# Altium PCB PCB1.PcbDoc
Units mm, origin at the board's own origin, x right, y up, seen from the top; angles counter-clockwise.
Board outline 280 x 120 mm, 2 copper layers (Top Layer, Bottom Layer); 355 components, 276 nets, 1028 pads, 0 vias.
Unrouted connection lines stored in the file: 715.
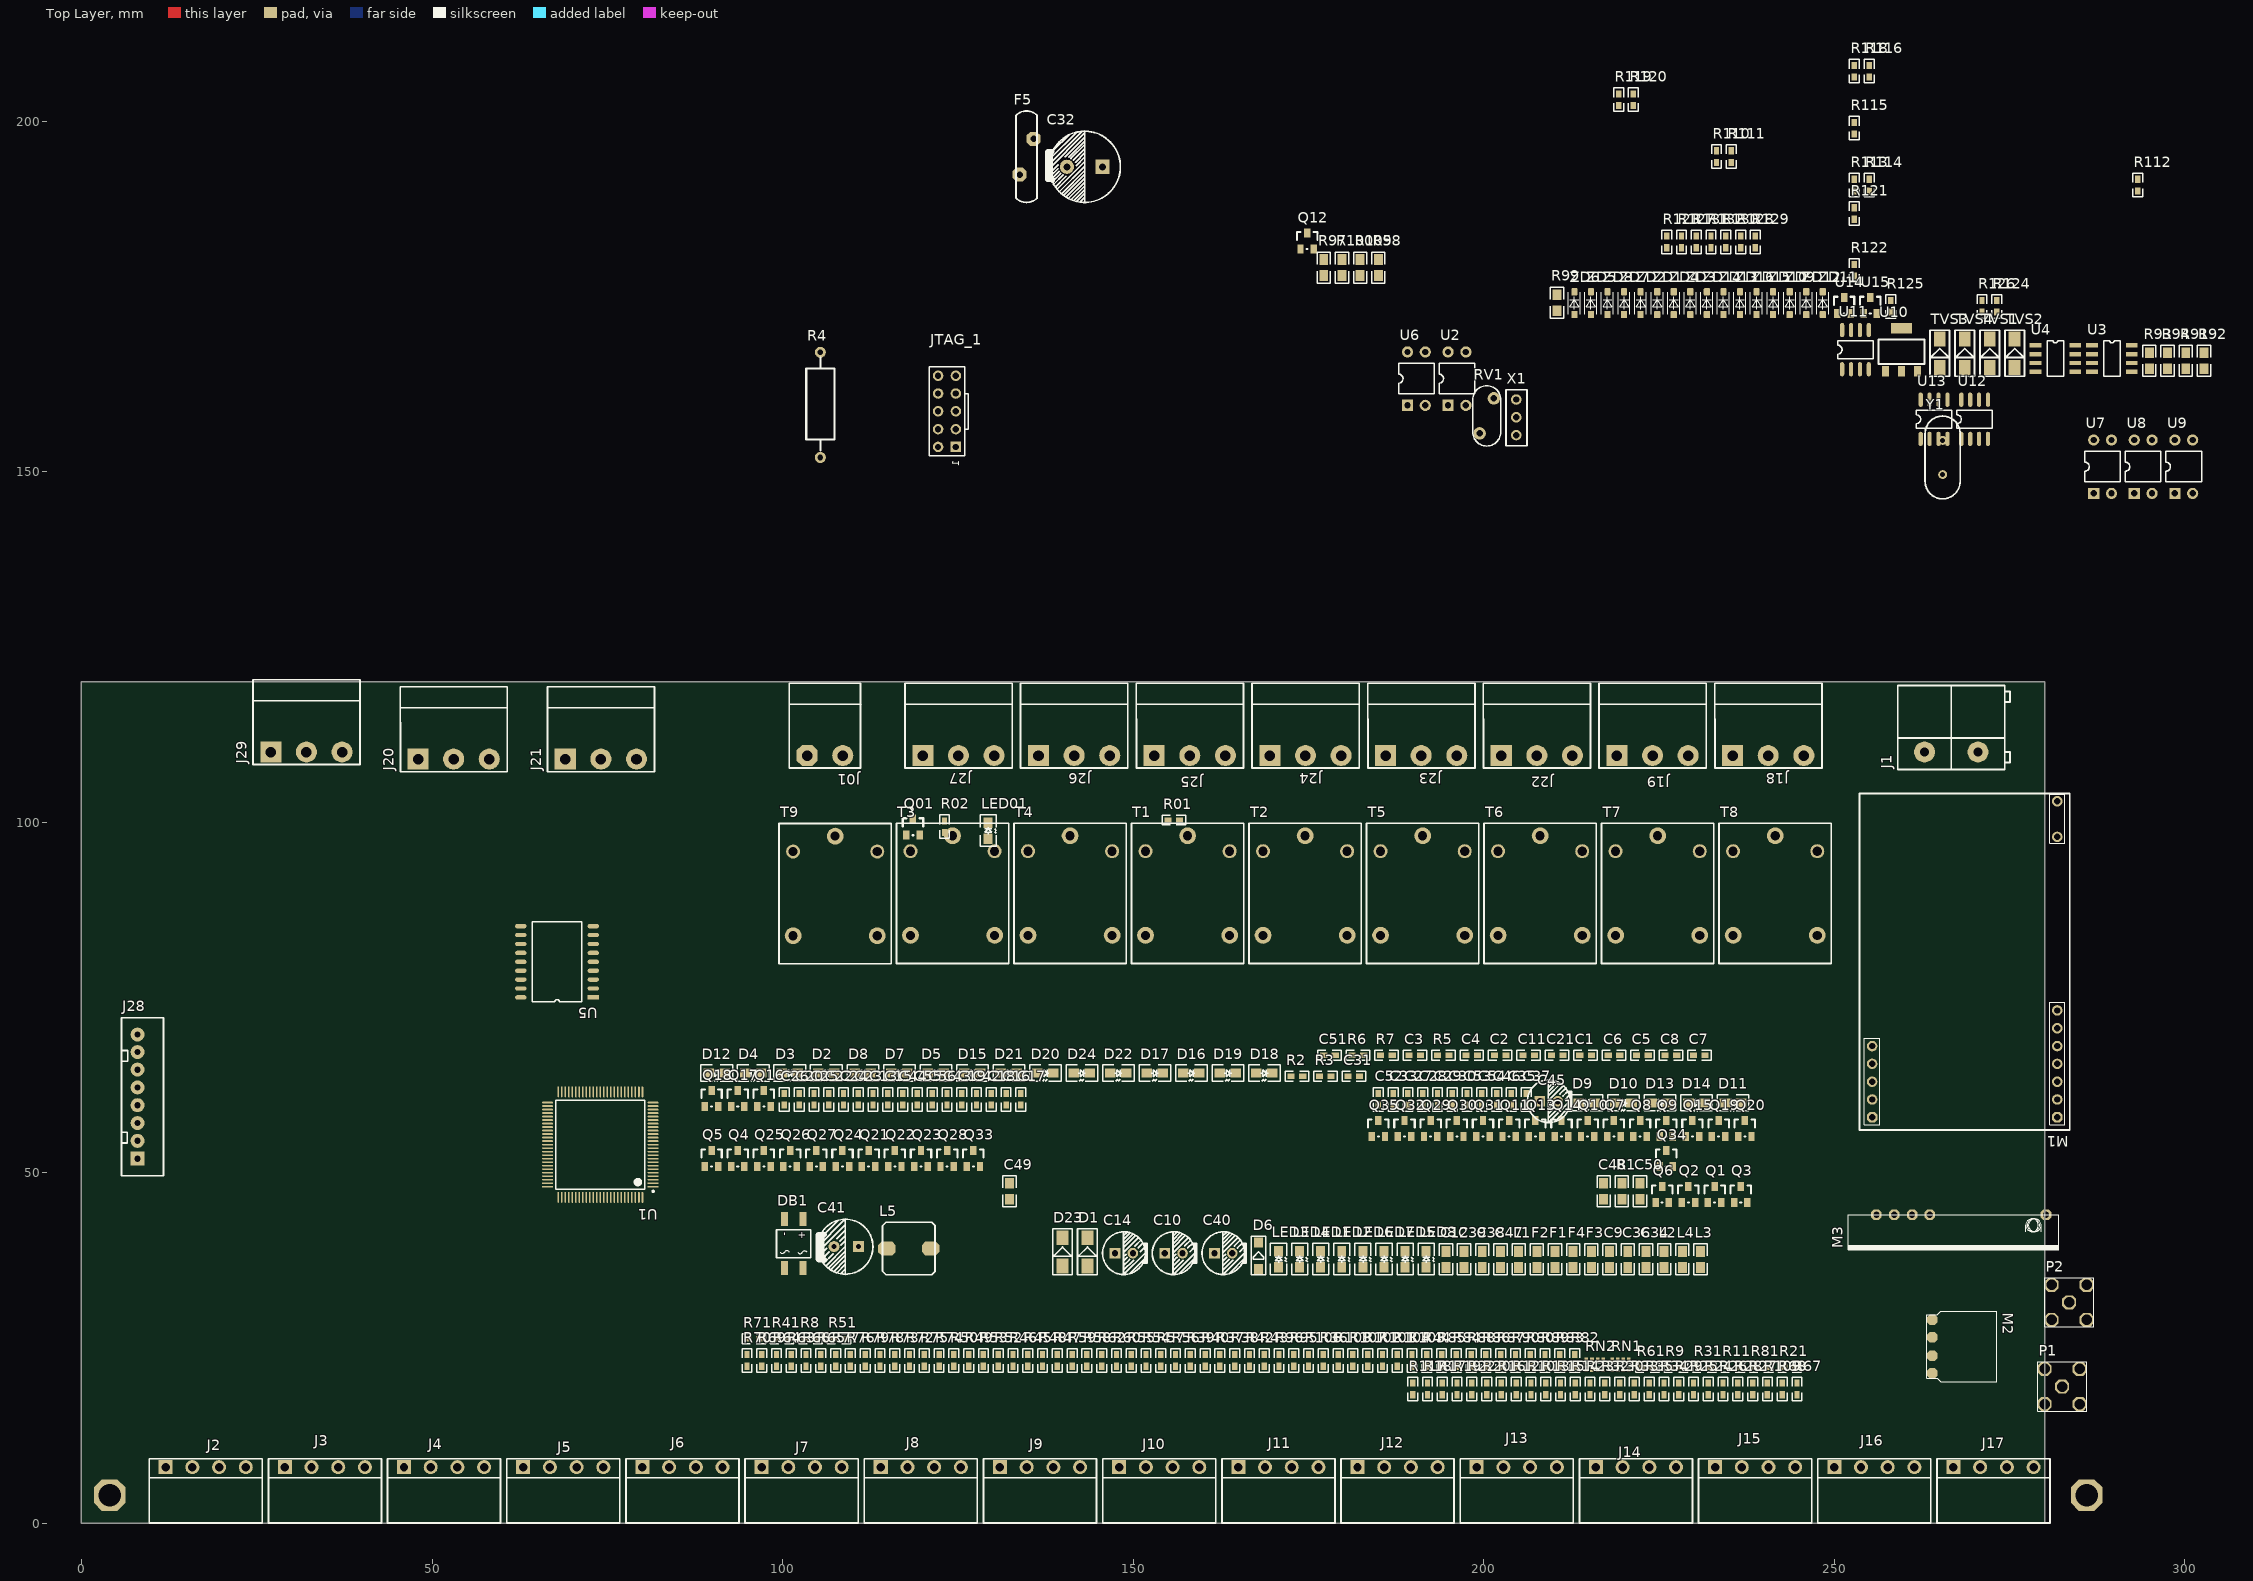
[diagram p0: Top Layer view]
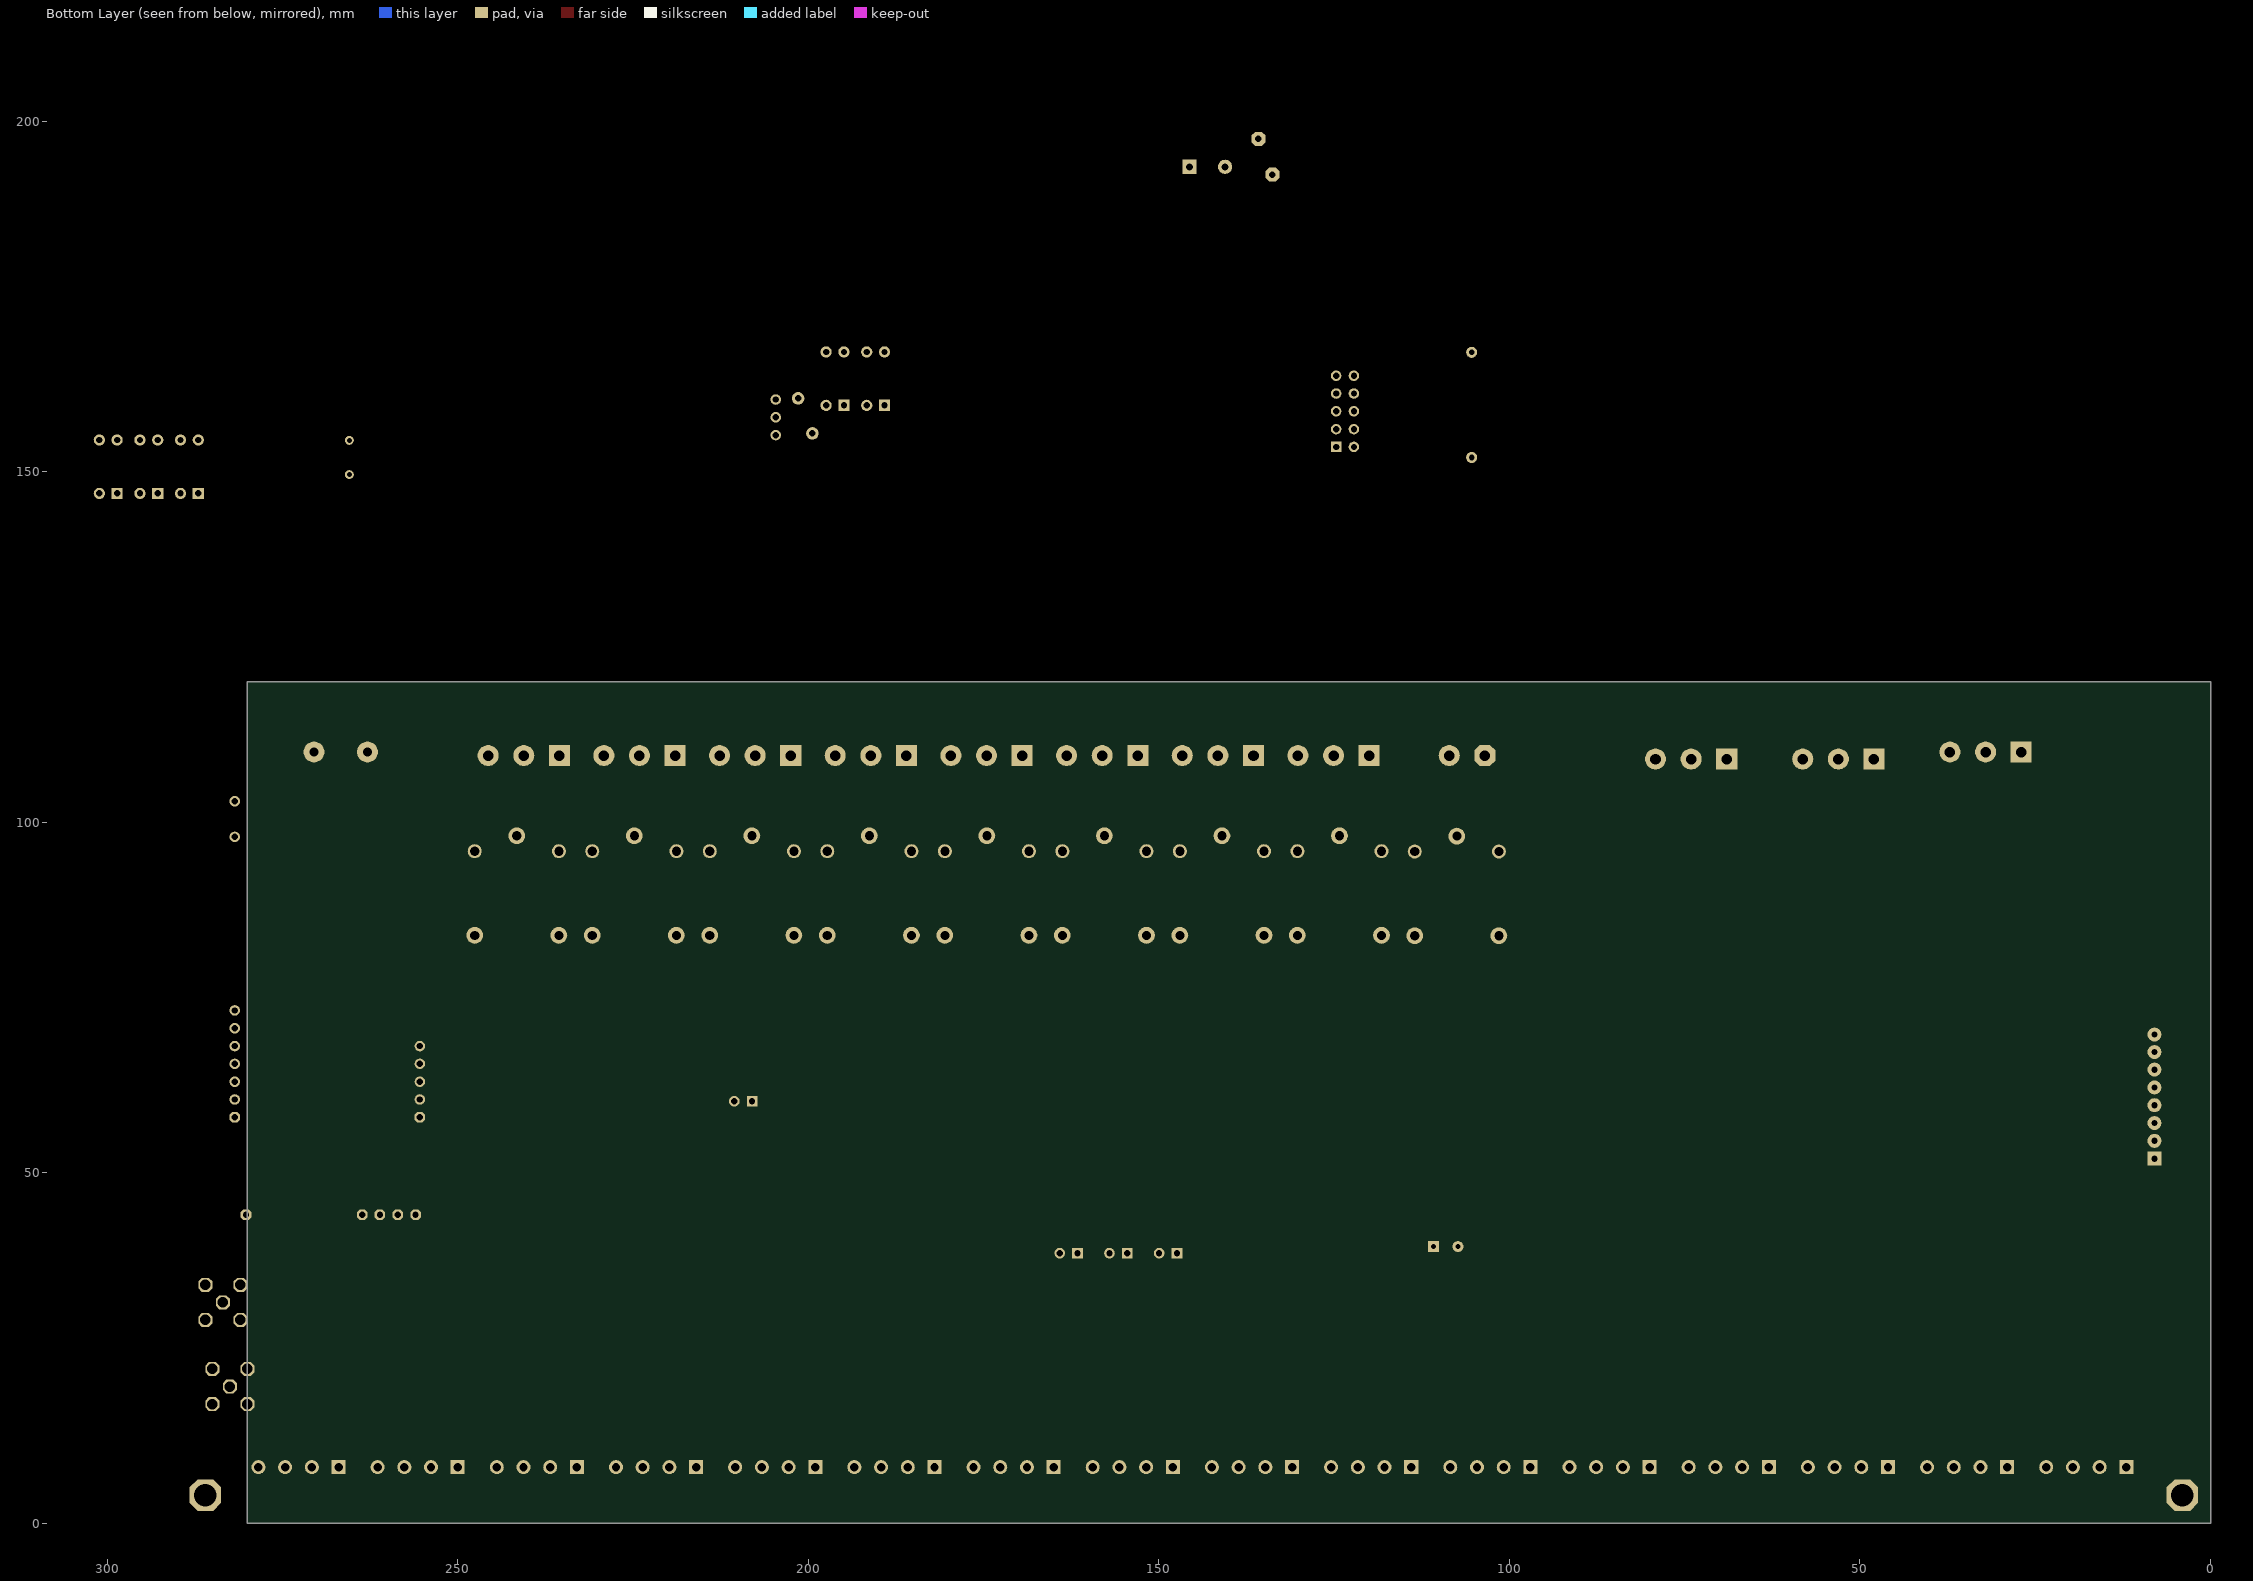
[diagram p1: Bottom Layer view, seen from below]

## Layer stack, top to bottom
Top Solder: solder mask 0.0102, Solder Resist, Dk 3.5
Top Layer: signal copper 0.0356
Dielectric 1: dielectric 0.32, FR-4, Dk 4.8
Bottom Layer: signal copper 0.0356
Bottom Solder: solder mask 0.0102, Solder Resist, Dk 3.5

## Board outline
0,0 0,120 280,120 280,0

## Design rules (kind name [scope] priority, off if disabled: settings)
Clearance [All] p1: gap=0.254
PolygonConnect [All] p1: connectstyle=Relief reliefconductorwidth=0.254 reliefentries=4 polygonreliefangle="90 Angle" airgapwidth=0.254
RoutingVias [All] p1: holewidth=0.711 width=1.27 viastyle="Through Hole" minholewidth=0.711 minwidth=1.27 maxholewidth=0.711 maxwidth=1.27
SolderMaskExpansion [All] p1: expansion=0.102
Width [All] p1: maxlimit=0.254 minlimit=0.254 preferedwidth=0.254
29 further rules are at their usual default settings.

## Components (designator, comment, footprint, x,y, rotation, side; value= is the part's Value field where it differs from the comment)
C1 "104" 0603 213.701,66.766 r0 top
C2 "18p" 0603 201.527,66.766 r0 top
C3 "18p" 0603 189.353,66.766 r0 top
C4 "104" 0603 197.469,66.766 r0 top
C5 "104" 0603 221.817,66.766 r0 top
C6 "104" 0603 217.759,66.766 r0 top
C7 "104" 0603 229.933,66.766 r0 top
C8 "104" 0603 225.875,66.766 r0 top
C9 "10uF/16V" 0805 217.952,36.48 r90 top
C10 "100uF/25V" RB2.54 154.509,38.519 r0 top
C11 "0.1uF" 0603 205.585,66.766 r0 top
C12 "10uF/16V" 0805 194.606,36.48 r90 top
C13 "104" 0603 112.903,59.64 r90 top
C14 "100uF/25V" RB2.54 147.421,38.519 r0 top
C15 "0.1uF" 0603 115.011,59.64 r90 top
C16 "0.1uF" 0603 131.875,59.64 r90 top
C17 "0.1uF" 0603 133.983,59.64 r90 top
C18 "0.1uF" 0603 129.767,59.64 r90 top
C19 "0.1uF" 0603 125.551,59.64 r90 top
C20 "0.1uF" 0603 102.363,59.64 r90 top
C21 "0.1uF" 0603 209.643,66.766 r0 top
C22 "0.1uF" 0603 106.579,59.64 r90 top
C23 "0.1uF" 0603 110.795,59.64 r90 top
C24 "0.1uF" 0603 108.687,59.64 r90 top
C25 "0.1uF" 0603 104.471,59.64 r90 top
C26 "0.1uF" 0603 100.255,59.64 r90 top
C27 "0.1uF" 0603 189.19,59.64 r90 top
C28 "0.1uF" 0603 191.298,59.64 r90 top
C29 "0.1uF" 0603 193.406,59.64 r90 top
C30 "0.1uF" 0603 195.514,59.64 r90 top
C31 "0.1uF" 0603 180.647,63.757 r0 top
C32 "470uF/35V" RB5.0-10 145.635,193.465 r0 top
C33 "0.1uF" 0603 187.082,59.64 r90 top
C34 "10uF" 0805 223.14,36.48 r90 top
C35 "0.1uF" 0603 203.946,59.64 r90 top
C36 "10uF" 0805 220.546,36.48 r90 top
C37 "0.1uF" 0603 206.054,59.64 r90 top
C38 "104" 0805 199.794,36.48 r90 top
C39 "104" 0805 197.2,36.48 r90 top
C40 "100uF/25V" RB2.54 161.597,38.519 r0 top
C41 "470uF/25V" RB3.5 107.343,39.456 r0 top
C42 "0.1uF" 0603 127.659,59.64 r90 top
C43 "0.1uF" 0603 123.443,59.64 r90 top
C44 "1nF" 0603 117.119,59.64 r90 top
C45 "100uF/6.3V" RB2.54 208.013,60.19 r0 top
C46 "0.1uF" 0603 201.838,59.64 r90 top
C47 "10uF/16V" 0805 202.388,36.48 r90 top
C48 "10uF" 0805 217.11,46.191 r90 top
C49 "10uF" 0805 132.348,46.191 r90 top
C50 "10uF/16V" 0805 222.298,46.191 r90 top
C51 "0.1uF" 0603 177.179,66.766 r0 top
C52 "0.1uF" 0603 184.974,59.64 r90 top
C53 "470pF" 0603 197.622,59.64 r90 top
C54 "470pF" 0603 199.73,59.64 r90 top
C55 "470pF" 0603 119.227,59.64 r90 top
C56 "470pF" 0603 121.335,59.64 r90 top
D1 "IN4007" SMB 143.481,36.687 r90 top
D2 "LED-R" LED-0805 105.078,64.215 r0 top
D3 "LED-R" LED-0805 99.87,64.215 r0 top
D4 "LED-R" LED-0805 94.662,64.215 r0 top
D5 "LED-R" LED-0805 120.702,64.215 r0 top
D6 "12V" SOD-123A 167.879,36.283 r90 top
D7 "LED-R" LED-0805 115.494,64.215 r0 top
D8 "LED-R" LED-0805 110.286,64.215 r0 top
D9 "LED-R" LED-0805 213.573,59.948 r0 top
D10 "LED-R" LED-0805 218.781,59.948 r0 top
D11 "LED-R" LED-0805 234.405,59.948 r0 top
D12 "LED-R" LED-0805 89.454,64.215 r0 top
D13 "LED-R" LED-0805 223.989,59.948 r0 top
D14 "LED-R" LED-0805 229.197,59.948 r0 top
D15 "LED-R" LED-0805 125.91,64.215 r0 top
D16 "LED-R" LED-0805 157.158,64.215 r0 top
D17 "LED-R" LED-0805 151.95,64.215 r0 top
D18 "LED-R" LED-0805 167.573,64.215 r0 top
D19 "LED-R" LED-0805 162.365,64.215 r0 top
D20 "LED-R" LED-0805 136.326,64.215 r0 top
D21 "LED-R" LED-0805 131.118,64.215 r0 top
D22 "LED-R" LED-0805 146.742,64.215 r0 top
D23 "SS34" SMB 139.919,36.687 r90 top
D24 "LED-R" LED-0805 141.534,64.215 r0 top
DB1 "MB6S" SOIC-4 100.279,36.412 r90 top
F1 "FUSE2" 0805 210.17,36.48 r90 top
F2 "FUSE2" 0805 207.576,36.48 r90 top
F3 "FUSE2" 0805 215.358,36.48 r90 top
F4 "FUSE2" 0805 212.764,36.48 r90 top
F5 "FUSE2" "FUSE RL60-110" 135.803,197.456 r90 top
J01 "7.62-2P" 5.08-2P 103.5,109.5 r180 top
J1 "7.62-2P" 7.62-2 270.5,109.5 r180 top
J2 "2EDGR-5.08-4P" 3.81-4P 12,8 r0 top
J3 "2EDGR-5.08-4P" 3.81-4P 29,8 r0 top
J4 "2EDGR-5.08-4P" 3.81-4P 46,8 r0 top
J5 "2EDGR-5.08-4P" 3.81-4P 63,8 r0 top
J6 "2EDGR-5.08-4P" 3.81-4P 80,8 r0 top
J7 "2EDGR-5.08-4P" 3.81-4P 97,8 r0 top
J8 "2EDGR-5.08-4P" 3.81-4P 114,8 r0 top
J9 "2EDGR-5.08-4P" 3.81-4P 131,8 r0 top
J10 "2EDGR-5.08-4P" 3.81-4P 148,8 r0 top
J11 "2EDGR-5.08-4P" 3.81-4P 165,8 r0 top
J12 "2EDGR-5.08-4P" 3.81-4P 182,8 r0 top
J13 "2EDGR-5.08-4P" 3.81-4P 199,8 r0 top
J14 "2EDGR-5.08-4P" 3.81-4P 216,8 r0 top
J15 "2EDGR-5.08-4P" 3.81-4P 233,8 r0 top
J16 "2EDGR-5.08-4P" 3.81-4P 250,8 r0 top
J17 "2EDGR-5.08-4P" 3.81-4P 267,8 r0 top
J18 "2EDGR-5.08-3P" 5.08-3P 235.5,109.5 r180 top
J19 "2EDGR-5.08-3P" 5.08-3P 219,109.5 r180 top
J20 "2EDGR-5.08-3P" 5.08-3P 48,109 r180 top
J21 "2EDGR-5.08-3P" 5.08-3P 69,109 r180 top
J22 "2EDGR-5.08-3P" 5.08-3P 202.5,109.5 r180 top
J23 "2EDGR-5.08-3P" 5.08-3P 186,109.5 r180 top
J24 "2EDGR-5.08-3P" 5.08-3P 169.5,109.5 r180 top
J25 "2EDGR-5.08-3P" 5.08-3P 153,109.5 r180 top
J26 "2EDGR-5.08-3P" 5.08-3P 136.5,109.5 r180 top
J27 "2EDGR-5.08-3P" 5.08-3P 120,109.5 r180 top
J28 "SIP8-2.54" 2.54-8 8,52 r90 top
J29 "2EDGR-5.08-3P" 5.08-3P 27,110 r180 top
JTAG_1 "JTAG_10" JTAG_10 124.715,153.512 r90 top
L1 "100R" 0805 204.982,36.48 r90 top
L2 "100R" 0805 225.734,36.48 r90 top
L3 "100R" 0805 230.922,36.48 r90 top
L4 "100R" 0805 228.328,36.48 r90 top
L5 "4.7uH" "INDUCTOR 7*7" 121.11,39.18 r0 top
LED1 "LED-R" LED-0805 176.749,36.51 r90 top
LED01 "LED-R" LED-0805 129.323,97.629 r90 top
LED2 "LED-R" LED-0805 179.759,36.51 r90 top
LED3 "LED-R" LED-0805 170.73,36.51 r90 top
LED4 "LED-R" LED-0805 173.74,36.51 r90 top
LED5 "LED-R" LED-0805 188.787,36.51 r90 top
LED6 "LED-R" LED-0805 182.768,36.51 r90 top
LED7 "LED-R" LED-0805 185.777,36.51 r90 top
LED8 "LED-R" LED-0805 191.796,36.51 r90 top
M1 "HL-PLC V3.0" "HL-PLC V3.0" 282,103 r180 top
M2 "H34A" H34A 264,29 r270 top
M3 "315MHZ" 315MHZ 282,44 r180 top
P1 "COAX-M" ST-TH1 279,16 r0 top
P2 "COAX-M" ST-TH1 280,28 r0 top
Q1 "8050" SOT-23 231.977,45.758 r0 top
Q01 "8050" SOT-23 117.639,98.137 r0 top
Q2 "8050" SOT-23 228.243,45.758 r0 top
Q3 "8050" SOT-23 235.711,45.758 r0 top
Q4 "8050" SOT-23 92.648,50.892 r0 top
Q5 "8050" SOT-23 88.914,50.892 r0 top
Q6 "8050" SOT-23 224.509,45.758 r0 top
Q7 "8050" SOT-23 217.616,55.159 r0 top
Q8 "8050" SOT-23 221.35,55.159 r0 top
Q9 "8050" SOT-23 225.084,55.159 r0 top
Q10 "8050" SOT-23 213.882,55.159 r0 top
Q11 "8050" SOT-23 202.681,55.159 r0 top
Q12 "8050" SOT-23 173.863,181.737 r0 top
Q13 "8050" SOT-23 206.415,55.159 r0 top
Q14 "8050" SOT-23 210.149,55.159 r0 top
Q15 "8050" SOT-23 228.818,55.159 r0 top
Q16 "8050" SOT-23 96.382,59.426 r0 top
Q17 "8050" SOT-23 92.648,59.426 r0 top
Q18 "8050" SOT-23 88.914,59.426 r0 top
Q19 "8050" SOT-23 232.551,55.159 r0 top
Q20 "8050" SOT-23 236.285,55.159 r0 top
Q21 "8050" SOT-23 111.317,50.892 r0 top
Q22 "8050" SOT-23 115.051,50.892 r0 top
Q23 "8050" SOT-23 118.785,50.892 r0 top
Q24 "8050" SOT-23 107.583,50.892 r0 top
Q25 "8050" SOT-23 96.382,50.892 r0 top
Q26 "8050" SOT-23 100.116,50.892 r0 top
Q27 "8050" SOT-23 103.85,50.892 r0 top
Q28 "8050" SOT-23 122.519,50.892 r0 top
Q29 "8050" SOT-23 191.48,55.159 r0 top
Q30 "8050" SOT-23 195.213,55.159 r0 top
Q31 "8050" SOT-23 198.947,55.159 r0 top
Q32 "8050" SOT-23 187.746,55.159 r0 top
Q33 "8050" SOT-23 126.252,50.892 r0 top
Q34 "3904" SOT-23 225.084,50.892 r0 top
Q35 "3904" SOT-23 184.012,55.159 r0 top
R1 "1M" 0805 219.704,46.191 r90 top
R01 "10K" 0603 154.977,100.296 r0 top
R2 "10K" 0603 172.531,63.757 r0 top
R02 "1K" 0603 123.1,98.518 r90 top
R3 "10K" 0603 176.589,63.757 r0 top
R4 "100K" AXIAL0.6 105.382,152.013 r90 top
R5 "1K" 0603 193.411,66.766 r0 top
R6 "1K" 0603 181.237,66.766 r0 top
R7 "1K" 0603 185.295,66.766 r0 top
R8 "1K" 0603 103.181,26.298 r0 top
R9 "1K" 0603 226.595,22.24 r0 top
R10 "1K" 0603 206.737,18.332 r90 top
R11 "10K" 0603 234.711,22.24 r0 top
R12 "10K" 0603 204.629,18.332 r90 top
R13 "10K" 0603 208.845,18.332 r90 top
R14 "10K" 0603 213.061,18.332 r90 top
R15 "10K" 0603 210.953,18.332 r90 top
R16 "10K" 0603 202.521,18.332 r90 top
R17 "10K" 0603 194.089,18.332 r90 top
R18 "10K" 0603 191.981,18.332 r90 top
R19 "1K" 0603 196.197,18.332 r90 top
R20 "1K" 0603 200.413,18.332 r90 top
R21 "1K" 0603 242.827,22.24 r0 top
R22 "1K" 0603 198.305,18.332 r90 top
R23 "1K" 0603 215.169,18.332 r90 top
R24 "1K" 0603 232.033,18.332 r90 top
R25 "1K" 0603 229.925,18.332 r90 top
R26 "1K" 0603 234.141,18.332 r90 top
R27 "1K" 0603 238.357,18.332 r90 top
R28 "1K" 0603 236.249,18.332 r90 top
R29 "1K" 0603 227.817,18.332 r90 top
R30 "1K" 0603 219.385,18.332 r90 top
R31 "1K" 0603 230.653,22.24 r0 top
R32 "1K" 0603 217.277,18.332 r90 top
R33 "1K" 0603 221.493,18.332 r90 top
R34 "1K" 0603 225.709,18.332 r90 top
R35 "1K" 0603 223.601,18.332 r90 top
R36 "1K" 0603 177.127,22.39 r90 top
R37 "1K" 0603 162.371,22.39 r90 top
R38 "1K" 0603 164.479,22.39 r90 top
R39 "1K" 0603 158.155,22.39 r90 top
R40 "1K" 0603 160.263,22.39 r90 top
R41 "1K" 0603 99.123,26.298 r0 top
R42 "1K" 0603 166.587,22.39 r90 top
R43 "270R" 0603 168.695,22.39 r90 top
R44 "270R" 0603 191.883,22.39 r90 top
R45 "270R" 0603 134.967,22.39 r90 top
R46 "270R" 0603 132.859,22.39 r90 top
R47 "270R" 0603 139.183,22.39 r90 top
R48 "270R" 0603 137.075,22.39 r90 top
R49 "270R" 0603 126.535,22.39 r90 top
R50 "270R" 0603 124.427,22.39 r90 top
R51 "10K" 0603 107.239,26.298 r0 top
R52 "10K" 0603 130.751,22.39 r90 top
R53 "10K" 0603 128.643,22.39 r90 top
R54 "10K" 0603 151.831,22.39 r90 top
R55 "10K" 0603 149.723,22.39 r90 top
R56 "10K" 0603 156.047,22.39 r90 top
R57 "10K" 0603 153.939,22.39 r90 top
R58 "10K" 0603 143.399,22.39 r90 top
R59 "1K" 0603 141.291,22.39 r90 top
R60 "1K" 0603 147.615,22.39 r90 top
R61 "1K" 0603 222.537,22.24 r0 top
R62 "1K" 0603 145.507,22.39 r90 top
R63 "1K" 0603 101.239,22.39 r90 top
R64 "1K" 0603 99.131,22.39 r90 top
R65 "1K" 0603 105.455,22.39 r90 top
R66 "1K" 0603 103.347,22.39 r90 top
R67 "1K" 0603 244.681,18.332 r90 top
R68 "1K" 0603 242.573,18.332 r90 top
R69 "1K" 0603 97.023,22.39 r90 top
R70 "1K" 0603 94.915,22.39 r90 top
R71 "1K" 0603 95.065,26.298 r0 top
R72 "1K" 0603 118.103,22.39 r90 top
R73 "1K" 0603 115.995,22.39 r90 top
R74 "1K" 0603 122.319,22.39 r90 top
R75 "1K" 0603 120.211,22.39 r90 top
R76 "1K" 0603 109.671,22.39 r90 top
R77 "1K" 0603 107.563,22.39 r90 top
R78 "1K" 0603 113.887,22.39 r90 top
R79 "1K" 0603 111.779,22.39 r90 top
R80 "1K" 0603 206.639,22.39 r90 top
R81 "1K" 0603 238.769,22.24 r0 top
R82 "1K" 0603 212.963,22.39 r90 top
R83 "270R" 0603 210.855,22.39 r90 top
R84 "270R" 0603 196.099,22.39 r90 top
R85 "270R" 0603 193.991,22.39 r90 top
R86 "270R" 0603 200.315,22.39 r90 top
R87 "270R" 0603 202.423,22.39 r90 top
R88 "270R" 0603 198.207,22.39 r90 top
R89 "270R" 0603 208.747,22.39 r90 top
R90 "270R" 0603 204.531,22.39 r90 top
R91 "10K" 0805 300.127,164.647 r90 top
R92 "10K" 0805 302.721,164.647 r90 top
R93 "10K" 0805 294.939,164.647 r90 top
R94 "10K" 0805 297.533,164.647 r90 top
R95 "120R" 0603 172.911,22.39 r90 top
R96 "120R" 0603 170.803,22.39 r90 top
R97 "10K" 0805 177.19,177.954 r90 top
R98 "10K" 0805 184.972,177.954 r90 top
R99 "47K" 0805 210.441,172.954 r90 top
R100 "10K" 0805 179.784,177.954 r90 top
R101 "10K" 0603 185.559,22.39 r90 top
R102 "10K" 0603 183.451,22.39 r90 top
R103 "10K" 0603 189.775,22.39 r90 top
R104 "10K" 0603 187.667,22.39 r90 top
R105 "10K" 0805 182.378,177.954 r90 top
R106 "10K" 0603 175.019,22.39 r90 top
R107 "10K" 0603 181.343,22.39 r90 top
R108 "10K" 0603 179.235,22.39 r90 top
R109 "10K" 0603 240.465,18.332 r90 top
R110 "1K" 0603 233.213,194.1 r90 top
R111 "201" 0603 235.321,194.1 r90 top
R112 "1K" 0603 293.271,190.042 r90 top
R113 "1K" 0603 252.873,190.042 r90 top
R114 "201" 0603 254.981,190.042 r90 top
R115 "1K" 0603 252.873,198.158 r90 top
R116 "10K" 0603 254.981,206.274 r90 top
R117 "201" 0603 189.873,18.332 r90 top
R118 "1K" 0603 252.873,206.274 r90 top
R119 "201" 0603 219.243,202.216 r90 top
R120 "20K" 0603 221.351,202.216 r90 top
R121 "1K" 0603 252.873,185.984 r90 top
R122 "1K" 0603 252.873,177.868 r90 top
R123 "1K" 0603 226.101,181.926 r90 top
R124 "10K" 0603 273.18,172.734 r90 top
R125 "56K" 0603 258.055,172.734 r90 top
R126 "10" 0603 271.072,172.734 r90 top
R127 "10" 0603 228.209,181.926 r90 top
R128 "10" 0603 236.641,181.926 r90 top
R129 "10" 0603 238.749,181.926 r90 top
R130 "120" 0603 234.533,181.926 r90 top
R131 "1K" 0603 230.317,181.926 r90 top
R132 "120" 0603 232.425,181.926 r90 top
RN1 "10k" 0603-4 217.904,21.792 r0 top
RN2 "10k" 0603-4 214.246,21.792 r0 top
RV1 "7D471K" 7D471 199.418,155.446 r90 top
T1 "JDQ" JDQ 157.766,98.049 r0 top
T2 "JDQ" JDQ 174.528,98.049 r0 top
T3 "JDQ" JDQ 124.242,98.049 r0 top
T4 "JDQ" JDQ 141.004,98.049 r0 top
T5 "JDQ" JDQ 191.29,98.049 r0 top
T6 "JDQ" JDQ 208.052,98.049 r0 top
T7 "JDQ" JDQ 224.814,98.049 r0 top
T8 "JDQ" JDQ 241.576,98.049 r0 top
T9 "JDQ" JDQ 107.5,98 r0 top
TVS1 "TVS" SMB 272.174,164.854 r90 top
TVS2 "TVS" SMB 275.736,164.854 r90 top
TVS3 "TVS" SMB 265.05,164.854 r90 top
TVS4 "TVS" SMB 268.612,164.854 r90 top
U1 "STM32F103VET6" LQFP100_L 74,54 r180 top
U2 "PC817" DIP4 194.916,159.448 r90 top
U3 "SP3485" SOP-8 286.761,168.022 r0 top
U4 "SP3485" SOP-8 278.698,168.022 r0 top
U5 "ULN2803A" SOIC-18 73,75 r180 top
U6 "TLP521-1" DIP4 189.128,159.448 r90 top
U7 "TLP521-1" DIP4 287.005,146.886 r90 top
U8 "TLP521-1" DIP4 292.793,146.886 r90 top
U9 "TLP521-1" DIP4 298.581,146.886 r90 top
U10 "LM1117" SOT-223 257.3,164.329 r0 top
U11 "TAJ1050" SO-8 251.12,164.595 r90 top
U12 "AOZ1016" SO-8 268.117,154.664 r90 top
U13 "TAJ1050" SO-8 262.329,154.664 r90 top
U14 "TVS_CAN" SOT-23 250.447,172.521 r0 top
U15 "TVS_CAN" SOT-23 254.181,172.521 r0 top
X1 "2.54-TX" 2.54-TX 206.169,153.673 r90 top
Y1 "8MHz" XTAL_US 265.458,149.571 r90 top
ZD1 "3V3" SOD-123 224.743,174.02 r90 top
ZD2 "3V3" SOD-123 222.38,174.02 r90 top
ZD3 "3V3" SOD-123 229.467,174.02 r90 top
ZD4 "3V3" SOD-123 227.105,174.02 r90 top
ZD5 "3V3" SOD-123 215.294,174.02 r90 top
ZD6 "3V3" SOD-123 212.932,174.02 r90 top
ZD7 "3V3" SOD-123 220.018,174.02 r90 top
ZD8 "3V3" SOD-123 217.656,174.02 r90 top
ZD9 "3V3" SOD-123 243.64,174.02 r90 top
ZD10 "3V3" SOD-123 241.278,174.02 r90 top
ZD11 "3V3" SOD-123 248.365,174.02 r90 top
ZD12 "3V3" SOD-123 246.002,174.02 r90 top
ZD13 "3V3" SOD-123 234.191,174.02 r90 top
ZD14 "3V3" SOD-123 231.829,174.02 r90 top
ZD15 "3V3" SOD-123 238.916,174.02 r90 top
ZD16 "3V3" SOD-123 236.554,174.02 r90 top

## Footprints (in the part's own frame and the unit in brackets; to place one, negate y for a bottom-side part, rotate by r counter-clockwise, add the part's x,y. Pads: shape width x height; smd on the part's side, far side on the other; paste and mask are expansions set on the pad)
2.54-8 [mm]
  rect 2x2 hole 0.9: 1(0,0)
  round 2 hole 0.9: 2(2.54,0) 3(5.08,0) 4(7.62,0) 5(10.16,0) 6(12.7,0) 7(15.2,0) 8(17.7,0)
  silkscreen extent -2.43,-3.71 20.1,2.29
2.54-TX [mm]
  round 1.5 hole 0.9: 1(6.604,1.524) 2(4.064,1.524) 3(1.524,1.524)
  silkscreen extent 0,0 8,3
3.81-4P [mm]
  rect 2x2 hole 1.2: 1(0,0)
  round 2 hole 1.2: 2(3.81,0) 4(11.43,0)
  round 2 hole 1.21: 3(7.62,0)
  silkscreen extent -2.34,-7.95 13.78,1.2
5.08-2P [mm]
  oct 3x3 hole 1.5: 1(0,0)
  round 3 hole 1.5: 2(-5.08,0)
  silkscreen extent -7.7,-10.31 2.55,1.8
5.08-3P [mm]
  rect 3x3 hole 1.5: 1(0,0)
  round 3 hole 1.5: 2(-5.08,0) 3(-10.16,0)
  silkscreen extent -12.74,-10.31 2.55,1.8
7.62-2 [mm]
  round 3 hole 1.3: 1(0,-0.5) 2(7.62,-0.5)
  silkscreen extent -4.57,-10 11.43,2
7D471 [mm]
  round 1.8 hole 0.9: 1(0,0) 2(5,-2.032)
  silkscreen extent -1.8,-3.02 6.8,0.98
315MHZ [mm]
  oct 1.5x1.5 hole 0.9: 1(1.8,0) 2(18.36,0) 3(20.9,0) 4(23.44,0) 5(25.98,0)
  silkscreen extent -0.02,0 30.06,5
0603 [mil]
  rect 40x30 smd: 1(0,0) 2(65,0)
  silkscreen extent -33,-28 98,28
0603-4 [mm]
  rect 0.5x0.5 smd: 1(0.4,0) 2(0.4,1.6) 3(1.2,0) 4(1.2,1.6) 5(2,0) 6(2,1.6) 7(2.8,0) 8(2.8,1.6)
  silkscreen extent 0.1,0.5 3.1,1.1
0805 [mil]
  rect 60x50 smd: 1(0,0) 2(90,0)
  silkscreen extent -42,-37 132,37
AXIAL0.6 [mil]
  round 62 hole 32: 1(0,0) 2(590.55,0)
  silkscreen extent 40,-79 560,79
DIP4 [mm]
  rect 1.6x1.6 hole 0.9: 1(0,0)
  round 1.6 hole 0.9: 2(0,-2.54) 3(7.62,-2.54) 4(7.62,0)
  silkscreen extent 1.64,-3.81 5.99,1.27
"FUSE RL60-110" [mm]
  oct 2x2 hole 0.9: 1(0,0) 2(-5.1,2)
  silkscreen extent -9.07,-0.5 3.97,2.5
H34A [mm]
  oct 1.5x1.5 smd: 1(0,0) 2(2.5,0) 3(5.1,0) 4(7.6,0)
  silkscreen extent -1.24,-0.8 8.85,9.2
"HL-PLC V3.0" [mm]
  oct 1.5x1.5 hole 0.9: 1(0.2,45.1) 12(26.6,45.1)
  round 1.5 hole 0.9: 2(0.2,42.56) 3(0.2,40.02) 4(0.2,37.48) 5(0.2,34.94) 6(0.2,32.4) 7(0.2,29.86) 8(26.6,34.94) 9(26.6,37.48) 10(26.6,40.02) 11(26.6,42.56) 13(0.2,5.1) 14(0.2,0.02)
  silkscreen extent -1.6,-1.1 28.4,46.9
"INDUCTOR 7*7" [mm]
  oct 2.5x2 smd: 1(0,0) 2(-6.239,-0.026)
  silkscreen extent -6.86,-3.74 0.64,3.76
JDQ [mm]
  round 2.4 hole 1.3: 1(0,0) 2(-6,-14.2) 3(6,-14.2)
  round 2 hole 1.3: 4(-6,-2.2) 5(6,-2.2)
  silkscreen extent -8,-18.2 8,1.8
JTAG_10 [mm]
  rect 1.5x1.5 hole 0.9: 1(0,0)
  round 1.5 hole 0.9: 2(0,2.54) 3(2.54,0) 4(2.54,2.54) 5(5.08,0) 6(5.08,2.54) 7(7.62,0) 8(7.62,2.54) 9(10.16,0) 10(10.16,2.54)
  silkscreen extent -1.27,-1.78 11.43,3.81
LED-0805 [mil]
  rect 60x50 smd: 1(0,0) 2(90,0)
  silkscreen extent -43,-46 134,45
LQFP100_L [mm] "Thin QFP, 100-Leads, Body 14x14mm, Pitch 0.5mm, IPC High Density"
  oval 1.55x0.25 smd: 1(-7.525,6) 2(-7.525,5.5) 3(-7.525,5) 4(-7.525,4.5) 5(-7.525,4) 6(-7.525,3.5) 7(-7.525,3) 8(-7.525,2.5) 9(-7.525,2) 10(-7.525,1.5) 11(-7.525,1) 12(-7.525,0.5) 13(-7.525,0) 14(-7.525,-0.5) 15(-7.525,-1) 16(-7.525,-1.5) 17(-7.525,-2) 18(-7.525,-2.5) 19(-7.525,-3) 20(-7.525,-3.5) 21(-7.525,-4) 22(-7.525,-4.5) 23(-7.525,-5) 24(-7.525,-5.5) 25(-7.525,-6) 51(7.525,-6) 52(7.525,-5.5) 53(7.525,-5) 54(7.525,-4.5) 55(7.525,-4) 56(7.525,-3.5) 57(7.525,-3) 58(7.525,-2.5) 59(7.525,-2) 60(7.525,-1.5) 61(7.525,-1) 62(7.525,-0.5) 63(7.525,0) 64(7.525,0.5) 65(7.525,1) 66(7.525,1.5) 67(7.525,2) 68(7.525,2.5) 69(7.525,3) 70(7.525,3.5) 71(7.525,4) 72(7.525,4.5) 73(7.525,5) 74(7.525,5.5) 75(7.525,6)
  oval 0.25x1.55 smd: 26(-6,-7.525) 27(-5.5,-7.525) 28(-5,-7.525) 29(-4.5,-7.525) 30(-4,-7.525) 31(-3.5,-7.525) 32(-3,-7.525) 33(-2.5,-7.525) 34(-2,-7.525) 35(-1.5,-7.525) 36(-1,-7.525) 37(-0.5,-7.525) 38(0,-7.525) 39(0.5,-7.525) 40(1,-7.525) 41(1.5,-7.525) 42(2,-7.525) 43(2.5,-7.525) 44(3,-7.525) 45(3.5,-7.525) 46(4,-7.525) 47(4.5,-7.525) 48(5,-7.525) 49(5.5,-7.525) 50(6,-7.525) 76(6,7.525) 77(5.5,7.525) 78(5,7.525) 79(4.5,7.525) 80(4,7.525) 81(3.5,7.525) 82(3,7.525) 83(2.5,7.525) 84(2,7.525) 85(1.5,7.525) 86(1,7.525) 87(0.5,7.525) 88(0,7.525) 89(-0.5,7.525) 90(-1,7.525) 91(-1.5,7.525) 92(-2,7.525) 93(-2.5,7.525) 94(-3,7.525) 95(-3.5,7.525) 96(-4,7.525) 97(-4.5,7.525) 98(-5,7.525) 99(-5.5,7.525) 100(-6,7.525)
  silkscreen extent -7.65,-6.35 6.35,6.8, body extent -7,-7 7,7, height 1.6
RB2.54 [mil]
  rect 60x60 hole 35: 1(0,0)
  round 60 hole 35: 2(100,0)
  silkscreen extent -70,-121 179,120
RB3.5 [mil]
  rect 62x62 hole 28: 1(137.8,0)
  round 62 hole 28: 2(0,0)
  silkscreen extent -92,-158 218,155
RB5.0-10 [mil]
  rect 80x80 hole 40: 1(0,0)
  round 80 hole 40: 2(-200,0)
  silkscreen extent -309,-200 100,201
SMB [mm]
  rect 2.1x1.7 smd: 1(0,0) 2(4.05,0)
  silkscreen extent -1.25,-1.4 5.3,1.4
SO-8 [mil]
  oval 80x24 smd: 1(0,0) 2(0,-50) 3(0,-100) 4(0,-150) 5(220,-150) 6(220,-100) 7(220,-50) 8(220,0)
  silkscreen extent 60,-175 160,25
SOD-123 [mil]
  rrect25% 40x35 smd: 1(-64,0) 2(64,0)
  silkscreen extent -62,-33 62,34, body extent -76,-33 76,34, height 56
SOD-123A [mm]
  rect 1.418x1.22 smd: 1(0,0) 2(3.778,0)
  silkscreen extent -0.87,-1 4.65,1
SOIC-4 [mm]
  rect 2x1 smd: 1(0,0) 2(0,-2.6) 3(7,-2.6) 4(7,0)
  silkscreen extent 1.45,-3.75 5.45,1.15
SOIC-18 [mm]
  rect 1.62x0.62 smd: 1(0,0)
  oval 1.62x0.62 smd: 2(0,-1.27) 3(0,-2.54) 4(0,-3.81) 5(0,-5.08) 6(0,-6.35) 7(0,-7.62) 8(0,-8.89) 9(0,-10.16) 10(10.34,-10.16) 11(10.34,-8.89) 12(10.34,-7.62) 13(10.34,-6.35) 14(10.34,-5.08) 15(10.34,-3.81) 16(10.34,-2.54) 17(10.34,-1.27) 18(10.34,0)
  silkscreen extent 1.65,-10.79 8.7,0.64
SOP-8 [mil]
  rect 65x25 smd: 1(0,0) 2(0,-50) 3(0,-100) 4(0,-150) 5(224.41,-150) 6(224.41,-100) 7(224.41,-50) 8(224.41,0)
  silkscreen extent 65,-175 159,25
SOT-23 [mil]
  rect 36x50 smd: 1(0,0) 2(75,0) 3(37.5,90)
  silkscreen extent -20,0 95,95
SOT-223 [mm]
  rect 1x1.5 smd: 1(0,0) 2(2.3,0) 3(4.6,0)
  rect 3x1.5 smd: 4(2.3,6.096)
  silkscreen extent -1,1.02 5.59,4.52
ST-TH1 [mm]
  oct 2x2 hole 1.5: 1(3.5,3.5) 2(1,6) 3(6,6) 4(6,1) 5(1,1)
  silkscreen extent 0,0 7,7
XTAL_US [mil]
  round 50 hole 28: 1(0,0) 2(192.13,0)
  silkscreen extent -136,-98 328,98

## Part data
C1 C4 C5 C6 C7 C8 C9 C10 C11 C12 C13 C14 C15 C16 C17 C18 C19 C20 C21 C22 C23 C24 C25 C26 C27 C28 C29 C30 C31 C32 C34 C35 C36 C37 C40 C41 C42 C43 C44 C46 C47 C48 C49 C50 C51 C52: library part CAP
C2 C3 C38 C39 C53 C54 C55 C56: library part CAP, "陶瓷电容"
C33: library part C
C45: library part CAP, "钽电容"
D1 D23: library part DIODE
D2 D3 D4 D5 D7 D8 D9 D10 D11 D12 D13 D14 D15 D16 D17 D18 D19 D20 D21 D22 LED01: library part LED-RED, "红色LED"
D6 ZD1 ZD2 ZD3 ZD4 ZD5 ZD6 ZD7 ZD8 ZD9 ZD10 ZD11 ZD12 ZD13 ZD14 ZD15 ZD16: library part "Zener Diode"
D24 LED1 LED2 LED3 LED4 LED5 LED6 LED7 LED8: library part LED-RED, "绿色LED"
DB1: library part BRIDGE1
F1 F2 F3 F4: "SMD0805P010TS"
F5: "RL60-110"
J01 J1: library part SIP2A-2.50（带槽）
J2 J3 J4 J5 J6 J7 J8 J9 J10 J11 J12 J13 J14 J15 J16 J17: library part SIP4A-2.50(带槽)
J18 J19 J20 J21 J22 J23 J24 J25 J26 J27 J29: library part SIP3A-2.50（带槽）
L1 L2 L3 L4 L5: library part INDUCTOR
P1 P2: "SMA-J-P-H-ST-TH1"
Q1 Q01 Q2 Q3 Q4 Q5 Q6 Q7 Q8 Q9 Q10 Q11 Q12 Q13 Q14 Q15 Q16 Q17 Q18 Q19 Q20 Q21 Q22 Q23 Q24 Q25 Q26 Q27 Q28 Q29 Q30 Q31 Q32 Q33 Q34 Q35: library part NPN1
R1 R91 R92 R93 R94 R95 R96 R97 R98 R110 R111 R112 R113 R114 R115 R117 R118 R119 R121 R122 R123 R126 R127 R128 R129 R130 R131 R132: library part RES-1%, "高精度电阻"
R01 R99 R100 R101 R102 R103 R104 R105 R106 R107 R108 R109: library part Res
R2 R02 R3 R4 R5 R6 R7 R8 R9 R10 R11 R12 R13 R14 R15 R16 R17 R18 R19 R20 R21 R22 R23 R24 R25 R26 R27 R28 R29 R30 R31 R32 R33 R34 R35 R36 R37 R38 R39 R40 R41 R42 R43 R44 R45 R46 R47 R48 R49 R50 R51 R52 R53 R54 R55 R56 R57 R58 R59 R60 R61 R62 R63 R64 R65 R66 R67 R68 R69 R70 R71 R72 R73 R74 R75 R76 R77 R78 R79 R80 R81 R82 R83 R84 R85 R86 R87 R88 R89 R90 R116 R120 R124 R125: library part RES1
RN1 RN2: library part RESPACK
RV1: library part RV
TVS1 TVS2 TVS3 TVS4: "SMBJ12CA"
U1: "STM32 ARM-based 32-bit MCU with 64 Kbytes Flash, 100-pin LQFP, Industrial Temperature"
U2 U6 U7 U8 U9: library part TLP521, "光耦"
U3 U4: library part MAX3485
U14 U15: "NUP2105L"
Y1: library part XTAL, "Crystal Oscillator"

## Free pads (board coordinates)
  oct 4.5x4.5 hole 3.2: ""(4,4) ""(286,4)

## Nets (pads, with @x,y where several pads share a name; then routed paths per layer and width w, separated by ;. In a path a pad name is that pad's centre, name@x,y a point inside that pad or via, vN(x,y) a via of type N, cw(c..) or ccw(c..) an arc to the next point about the centre after c; other vN are vias at no path point)
485_A4: F1.2 J20.1 TVS1.2
485_A5: F4.2 J21.1 TVS4.2
485_B4: F2.2 J20.2 TVS2.1
485_B5: F3.2 J21.2 TVS3.1
AC_TEST: R10.2 U1.34 U2.4
AD_IN2: R105.1 U1.33
BOOT0: R3.1 U1.94
BOOT1: R2.1 U1.37
CANH1: C54.1 J28.7 R128.1 R132.1 U15.1
CANH2: C53.1 J29.1 R126.1 R130.1 U14.1
CANL1: C56.1 J28.8 R129.1 R132.2 U15.2
CANL2: C55.1 J29.2 R127.1 R130.2 U14.2
COM1: J18.2 T1.1
COM2: J22.2 T5.1
COM3: J24.2 T4.1
COM4: J26.2 T6.1
COM5: J19.2 T2.1
COM6: J23.2 T7.1
COM7: J25.2 T3.1
COM8: J27.2 T8.1
CPU_IN1: U1.55
CPU_IN2: U1.56
CPU_IN3: U1.57
CPU_IN4: U1.58
CPU_IN5: U1.59
CPU_IN6: U1.60
CPU_IN7: U1.61
CPU_IN8: U1.62
CPU_IN9: U1.38
CPU_IN10: U1.39
CPU_IN11: U1.40
CPU_IN12: U1.41
CPU_IN13: U1.42
CPU_IN14: U1.43
CPU_IN15: U1.44
CPU_IN16: U1.45
CPU_INT1: Q2.3 R27.2 R35.1
CPU_INT2: Q3.3 R28.2 R36.1
CPU_INT3: Q4.3 R29.2 R37.1
CPU_INT4: Q5.3 R30.2 R38.1
CPU_INT5: Q6.3 R31.2 R39.1
CPU_INT6: Q7.3 R32.2 R40.1
CPU_INT7: Q8.3 R33.2 R41.1
CPU_INT8: Q9.3 R34.2 R42.1
CPU_INT9: Q18.3 R67.2 R75.1
CPU_INT10: Q19.3 R68.2 R76.1
CPU_INT11: Q20.3 R69.2 R77.1
CPU_INT12: Q21.3 R70.2 R78.1
CPU_INT13: Q22.3 R71.2 R79.1
CPU_INT14: Q23.3 R72.2 R80.1
CPU_INT15: Q24.3 R73.2 R81.1
CPU_INT16: Q25.3 R74.2 R82.1
CPU_JDQ1: RN1.8 U1.1 U5.1
CPU_JDQ2: RN1.6 U1.2 U5.2
CPU_JDQ3: RN1.4 U1.3 U5.3
CPU_JDQ4: RN1.2 U1.4 U5.4
CPU_JDQ5: RN2.8 U1.5 U5.5
CPU_JDQ6: RN2.6 U1.7 U5.6
CPU_JDQ7: RN2.4 U1.8 U5.7
CPU_JDQ8: RN2.2 U1.9 U5.8
GND: C1.2 C2.2 C3.2 C4.2 C5.2 C6.2 C7.2 C9.1 C10.2 C11.2 C12.2 C15.2 C16.2 C17.2 C18.2 C19.2 C20.2 C21.2 C22.2 C23.2 C24.2 C25.2 C26.2 C27.2 C28.2 C29.2 C30.2 C31.2 C32.2 C33.1 C34.2 C35.2 C36.2 C37.2 C38.1 C39.2 C40.2 C41.2 C42.2 C43.2 C44.2 C45.2 C46.2 C47.2 C48.1 C49.1 C50.2 C51.1 C52.1 C53.2 C54.2 C55.2 C56.2 D24.2 J01.2 J2.4 J3.4 J4.4 J5.4 J6.4 J7.4 J8.4 J9.4 J10.4 J11.4 J12.4 J13.4 J14.4 J15.4 J16.4 J17.4 J20.3 J21.3 J28.3 J28.4 J29.3 JTAG_1.10 L1.1 L4.1 M1.6 M2.2 M3.5 P1.2 P1.3 P1.4 P1.5 P2.2 P2.3 P2.4 P2.5 Q01.2 Q1.2 Q2.2 Q3.2 Q4.2 Q5.2 Q6.2 Q7.2 Q8.2 Q9.2 Q10.2 Q11.2 Q12.2 Q13.2 Q14.2 Q15.2 Q16.2 Q17.2 Q18.2 Q19.2 Q20.2 Q21.2 Q22.2 Q23.2 Q24.2 Q25.2 Q26.2 Q27.2 Q28.2 Q29.2 Q30.2 Q31.2 Q32.2 Q33.2 Q34.2 Q35.2 R2.2 R3.2 R94.2 R100.1 R124.2 RN1.1 RN1.3 RN1.5 RN1.7 RN2.1 RN2.3 RN2.5 RN2.7 TVS1.1 TVS2.2 TVS3.2 TVS4.1 U1.10 U1.27 U1.49 U1.74 U1.99 U2.3 U3.5 U4.5 U5.9 U6.3 U7.3 U8.3 U9.3 U10.1 U11.2 U12.1 U12.3 U13.2 U14.3 U15.3 X1.3 ZD1.1 ZD2.1 ZD3.1 ZD4.1 ZD5.1 ZD6.1 ZD7.1 ZD8.1 ZD9.1 ZD10.1 ZD11.1 ZD12.1 ZD13.1 ZD14.1 ZD15.1 ZD16.1
HGND: C14.2 D6.1 DB1.4 U2.2
JTCK: JTAG_1.9 R94.1 U1.76
JTDI: JTAG_1.5 R92.2 U1.77
JTDO: JTAG_1.6 R98.2 U1.89
JTMS: JTAG_1.7 R93.2 U1.72
JTRST: JTAG_1.3 R91.2 U1.90
L_IN: J1.2 M1.14 R4.2 RV1.2
LED1: D2.2 U1.15
LED2: D3.2 U1.16
LED3: D4.2 U1.17
LED4: D5.2 U1.18
N_IN: DB1.3 J1.1 M1.13 RV1.1
NC1: J18.3 T1.3
NC2: J22.3 T5.3
NC3: J24.3 T4.3
NC4: J26.3 T6.3
NC5: J19.3 T2.3
NC6: J23.3 T7.3
NC7: J25.3 T3.3
NC8: J27.3 T8.3
NetC8_1: C8.1 L1.2 U1.20
NetC8_2: C8.2 L2.2 U1.21
NetC10_1: C10.1 D1.2 M1.7
NetC13_1: C13.1 L3.1 U1.22
NetC13_2: C13.2 L4.2 U1.19
NetC14_1: C14.1 D6.2 DB1.1 U2.1
NetC16_1: C16.1 Q2.1 R19.2
NetC17_1: C17.1 Q3.1 R20.2
NetC18_1: C18.1 Q4.1 R21.2
NetC19_1: C19.1 Q5.1 R22.2
NetC20_1: C20.1 Q6.1 R23.2
NetC21_1: C21.1 Q7.1 R24.2
NetC22_1: C22.1 Q8.1 R25.2
NetC23_1: C23.1 Q9.1 R26.2
NetC24_1: C24.1 Q18.1 R59.2
NetC25_1: C25.1 Q19.1 R60.2
NetC26_1: C26.1 Q20.1 R61.2
NetC27_1: C27.1 Q21.1 R62.2
NetC28_1: C28.1 Q22.1 R63.2
NetC29_1: C29.1 Q23.1 R64.2
NetC30_1: C30.1 Q24.1 R65.2
NetC31_1: C31.1 Q25.1 R66.2
NetC44_1: C44.1 R120.2
NetD2_1: D2.1 R5.2
NetD3_1: D3.1 R6.2
NetD4_1: D4.1 R7.2
NetD5_1: D5.1 R8.2
NetD7_1: D7.1 R43.1
NetD7_2: D7.2 Q10.3
NetD8_1: D8.1 R44.1
NetD8_2: D8.2 Q11.3
NetD9_1: D9.1 R45.1
NetD9_2: D9.2 Q12.3
NetD10_1: D10.1 R46.1
NetD10_2: D10.2 Q13.3
NetD11_1: D11.1 R47.1
NetD11_2: D11.2 Q14.3
NetD12_1: D12.1 R48.1
NetD12_2: D12.2 Q15.3
NetD13_1: D13.1 R49.1
NetD13_2: D13.2 Q16.3
NetD14_1: D14.1 R50.1
NetD14_2: D14.2 Q17.3
NetD15_1: D15.1 R83.1
NetD15_2: D15.2 Q26.3
NetD16_1: D16.1 R84.1
NetD16_2: D16.2 Q27.3
NetD17_1: D17.1 R85.1
NetD17_2: D17.2 Q28.3
NetD18_1: D18.1 R86.1
NetD18_2: D18.2 Q29.3
NetD19_1: D19.1 R87.1
NetD19_2: D19.2 Q30.3
NetD20_1: D20.1 R88.1
NetD20_2: D20.2 Q31.3
NetD21_1: D21.1 R89.1
NetD21_2: D21.2 Q32.3
NetD22_1: D22.1 R90.1
NetD22_2: D22.2 Q33.3
NetD23_2: D23.2 F5.1
NetD24_1: D24.1 R131.1
NetDB1_2: DB1.2 R4.1
NetF1_1: F1.1 R95.2 U3.6
NetF2_1: F2.1 R95.1 U3.7
NetF3_1: F3.1 R96.1 U4.7
NetF4_1: F4.1 R96.2 U4.6
NetJ2_3: J2.3 R11.2
NetJ3_3: J3.3 R12.2
NetJ4_3: J4.3 R13.2
NetJ5_3: J5.3 R14.2
NetJ6_3: J6.3 R15.2
NetJ7_3: J7.3 R16.2
NetJ8_3: J8.3 R17.2
NetJ9_3: J9.3 R18.2
NetJ10_3: J10.3 R51.2
NetJ11_3: J11.3 R52.2
NetJ12_3: J12.3 R53.2
NetJ13_3: J13.3 R54.2
NetJ14_3: J14.3 R55.2
NetJ15_3: J15.3 R56.2
NetJ16_3: J16.3 R57.2
NetJ17_3: J17.3 R58.2
NetL5_1: L5.1 U12.7 U12.8
NetLED1_1: LED1.1 R101.2
NetLED01_1: LED01.1 R01.2
NetLED2_1: LED2.1 R102.2
NetLED3_1: LED3.1 R103.2
NetLED4_1: LED4.1 R104.2
NetLED5_1: LED5.1 R106.2
NetLED6_1: LED6.1 R107.2
NetLED7_1: LED7.1 R108.2
NetLED8_1: LED8.1 R109.2
NetM1_5: M1.5 Q1.3
NetM2_1: M2.1 P1.1
NetM3_1: M3.1 P2.1
NetQ1_1: Q1.1 R9.1
NetQ01_1: Q01.1 R02.2
NetQ10_1: Q10.1 R35.2
NetQ11_1: Q11.1 R36.2
NetQ12_1: Q12.1 R37.2
NetQ13_1: Q13.1 R38.2
NetQ14_1: Q14.1 R39.2
NetQ15_1: Q15.1 R40.2
NetQ16_1: Q16.1 R41.2
NetQ17_1: Q17.1 R42.2
NetQ26_1: Q26.1 R75.2
NetQ27_1: Q27.1 R76.2
NetQ28_1: Q28.1 R77.2
NetQ29_1: Q29.1 R78.2
NetQ30_1: Q30.1 R79.2
NetQ31_1: Q31.1 R80.2
NetQ32_1: Q32.1 R81.2
NetQ33_1: Q33.1 R82.2
NetQ34_1: Q34.1 R113.1
NetQ34_3: Q34.3 R118.2 U11.8
NetQ35_1: Q35.1 R115.1
NetQ35_3: Q35.3 R121.2 U13.8
NetR11_1: R11.1 R19.1 ZD1.2
NetR12_1: R12.1 R20.1 ZD2.2
NetR13_1: R13.1 R21.1 ZD3.2
NetR14_1: R14.1 R22.1 ZD4.2
NetR15_1: R15.1 R23.1 ZD5.2
NetR16_1: R16.1 R24.1 ZD6.2
NetR17_1: R17.1 R25.1 ZD7.2
NetR18_1: R18.1 R26.1 ZD8.2
NetR51_1: R51.1 R59.1 ZD9.2
NetR52_1: R52.1 R60.1 ZD10.2
NetR53_1: R53.1 R61.1 ZD11.2
NetR54_1: R54.1 R62.1 ZD12.2
NetR55_1: R55.1 R63.1 ZD13.2
NetR56_1: R56.1 R64.1 ZD14.2
NetR57_1: R57.1 R65.1 ZD15.2
NetR58_1: R58.1 R66.1 ZD16.2
NetR99_1: R99.1 R100.2 R105.2
NetR111_1: R111.1 U8.1
NetR114_1: R114.1 U9.1
NetR116_2: R116.2 U12.6
NetR117_2: R117.2 U6.1
NetR119_2: R119.2 U7.1
NetR120_1: R120.1 U12.5
NetR122_1: R122.1 U8.4 U11.1
NetR123_1: R123.1 U9.4 U13.1
NetR124_1: R124.1 R125.2 U12.4
NetR126_2: R126.2 U11.7
NetR127_2: R127.2 U11.6
NetR128_2: R128.2 U13.7
NetR129_2: R129.2 U13.6
NetU6_2: U6.2 U11.4
NetU7_2: U7.2 U13.4
NO1: J18.1 T1.2
NO2: J22.1 T5.2
NO3: J24.1 T4.2
NO4: J26.1 T6.2
NO5: J19.1 T2.2
NO6: J23.1 T7.2
NO7: J25.1 T3.2
NO8: J27.1 T8.2
OSC_IN: C2.1 R1.1 U1.12 Y1.1
OSC_OUT: C3.1 R1.2 U1.13 Y1.2
OUT1: LED01.2 LED1.2 Q01.3 T1.5 T9.5 U5.18
OUT2: LED5.2 T5.5 U5.17
OUT3: LED6.2 T6.5 U5.16
OUT4: LED2.2 T4.5 U5.15
OUT5: LED3.2 T2.5 U5.14
OUT6: LED7.2 T7.5 U5.13
OUT7: LED4.2 T3.5 U5.12
OUT8: LED8.2 T8.5 U5.11
"PA2  USART2_TX": J28.5 U1.25
"PA3  USART2_RX": J28.6 U1.26
"PA9  USART1_TX": U1.68 X1.2
"PA10  USART1_RX": U1.69 X1.1
"PA11  CAN_RX": R112.1 U1.70 U7.4
"PA12  CAN_TX": U1.71 U9.2
"PB8  CAN_RX": R110.1 U1.95 U6.4
"PB9  CAN_TX": U1.96 U8.2
"PB10  USART3_TX": M1.2 U1.47
"PB11  USART3_RX": M1.3 U1.48
"PC10  UART4_TX": U1.78 U3.4
"PC11  UART4_RX": U1.79 U3.1
"PC12  UART5_TX": U1.80 U4.4
"PD2  UART5_RX": U1.83 U4.1
PLC_RST: R9.2 U1.46
POWER+12V: C32.1 C33.2 J2.1 J2.2 J3.1 J3.2 J4.1 J4.2 J5.1 J5.2 J6.1 J6.2 J7.1 J7.2 J8.1 J8.2 J9.1 J9.2 J10.1 J10.2 J11.1 J11.2 J12.1 J12.2 J13.1 J13.2 J14.1 J14.2 J15.1 J15.2 J16.1 J16.2 J17.1 J17.2 R101.1 R102.1 R103.1 R104.1 R106.1 R107.1 R108.1 R109.1 T1.4 T2.4 T3.4 T4.4 T5.4 T6.4 T7.4 T8.4 T9.2 U5.10
POWER/ON/OFF: R02.1 U1.23
PX.Y1: R115.2 U1.97
PX.Y2: R113.2 U1.98
R_DAT: M3.3 M3.4 U1.36
RESET: C38.2 JTAG_1.4 R97.1 U1.14
RS485_RE4: U1.81 U3.2 U3.3
RS485_RE5: U1.82 U4.2 U4.3
T_DAT: M2.4 U1.35
VCC+3.3V: C1.1 C4.1 C5.1 C6.1 C7.1 C9.2 C11.1 C34.1 C35.1 C36.1 C37.1 C39.1 C45.1 C46.1 JTAG_1.1 JTAG_1.2 L2.1 L3.2 M2.3 R5.1 R6.1 R7.1 R8.1 R10.1 R27.1 R28.1 R29.1 R30.1 R31.1 R32.1 R33.1 R34.1 R43.2 R44.2 R45.2 R46.2 R47.2 R48.2 R49.2 R50.2 R67.1 R68.1 R69.1 R70.1 R71.1 R72.1 R73.1 R74.1 R83.2 R84.2 R85.2 R86.2 R87.2 R88.2 R89.2 R90.2 R91.1 R92.1 R93.1 R97.2 R98.1 R110.2 R111.2 R112.2 R114.2 U1.11 U1.28 U1.50 U1.75 U1.100 U3.8 U4.8 U10.2 U10.4
VCC+5V: C12.1 C15.1 C40.1 C42.1 C47.1 C48.2 C49.2 C50.1 C51.2 C52.2 L5.2 M3.2 R117.1 R118.1 R119.1 R121.1 R122.2 R123.2 R125.1 R131.2 U10.3 U11.3 U13.3
VCC+12V: C41.1 C43.1 D1.1 F5.2 R01.1 R99.2 R116.1 T9.1 T9.4 U12.2
VIN: D23.1 J01.1 J28.1 J28.2
pads on no net: JTAG_1.8 M1.1 M1.4 M1.8 M1.9 M1.10 M1.11 M1.12 T9.3 U1.6 U1.24 U1.29 U1.30 U1.31 U1.32 U1.51 U1.52 U1.53 U1.54 U1.63 U1.64 U1.65 U1.66 U1.67 U1.73 U1.84 U1.85 U1.86 U1.87 U1.88 U1.91 U1.92 U1.93 U11.5 U13.5

## Silkscreen, mask and mechanical layers (free items; w line width, h text height)
Mechanical 1:
  lines w0.254: 280,120 0,120 0,0 290,0 290,120

## Text inside footprints (layer, text, board x,y; h text height)
DB1: Top Overlay "+" at 103.393,41.507 h1.02 r180; Top Overlay "-" at 99.845,41.519 h1.02 r270
JTAG_1: Top Overlay "1" at 125.223,151.607 h1 r90